# Altium PCB PCB.PcbDoc
Units mil, origin at the board's own origin, x right, y up, seen from the top; angles counter-clockwise.
Board outline 3149.61 x 1496.06 mil, 2 copper layers (Top Layer, Bottom Layer); 63 components, 30 nets, 170 pads, 22 vias.
Unrouted connection lines stored in the file: 66.
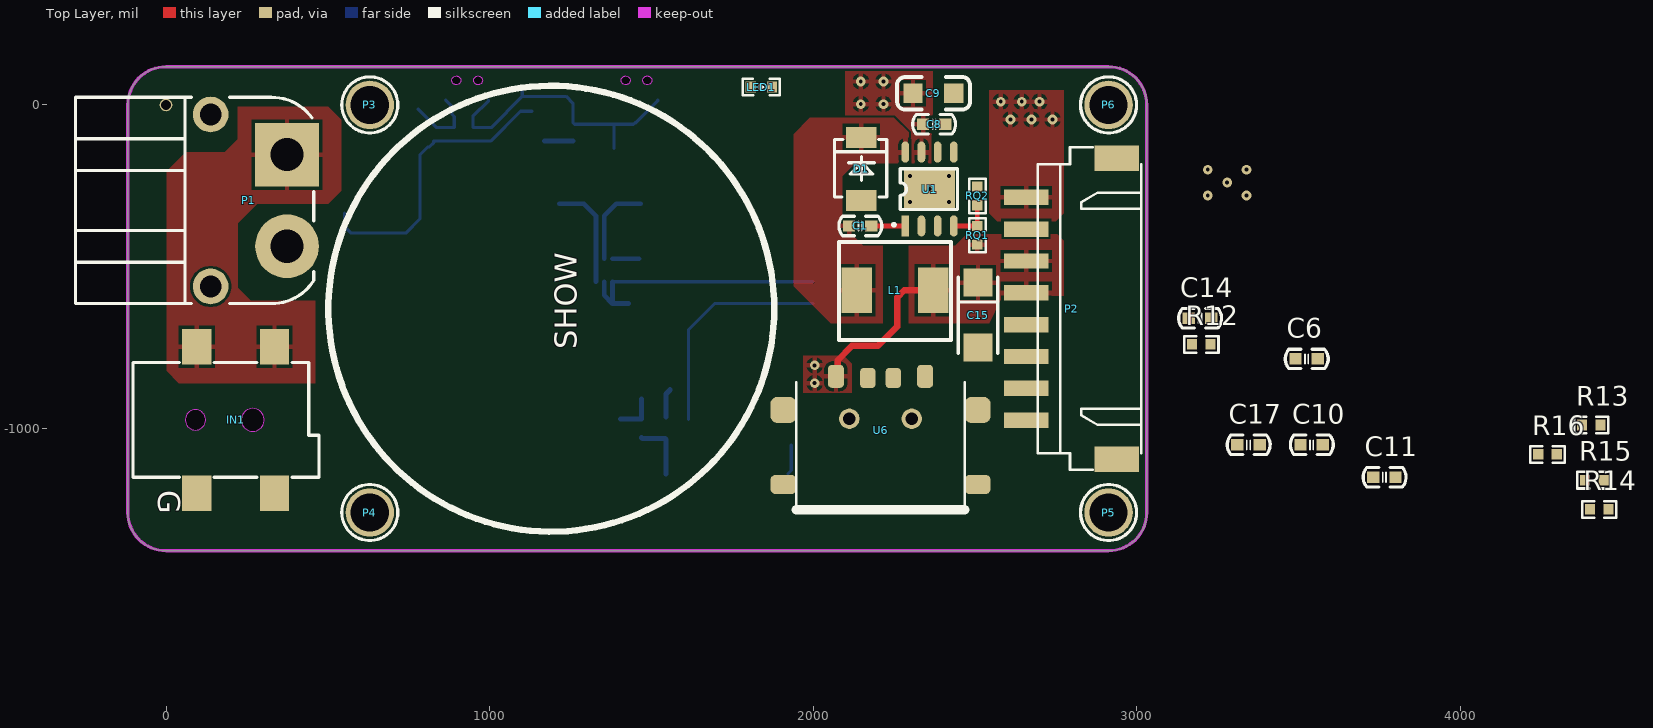
[diagram p0: Top Layer view]
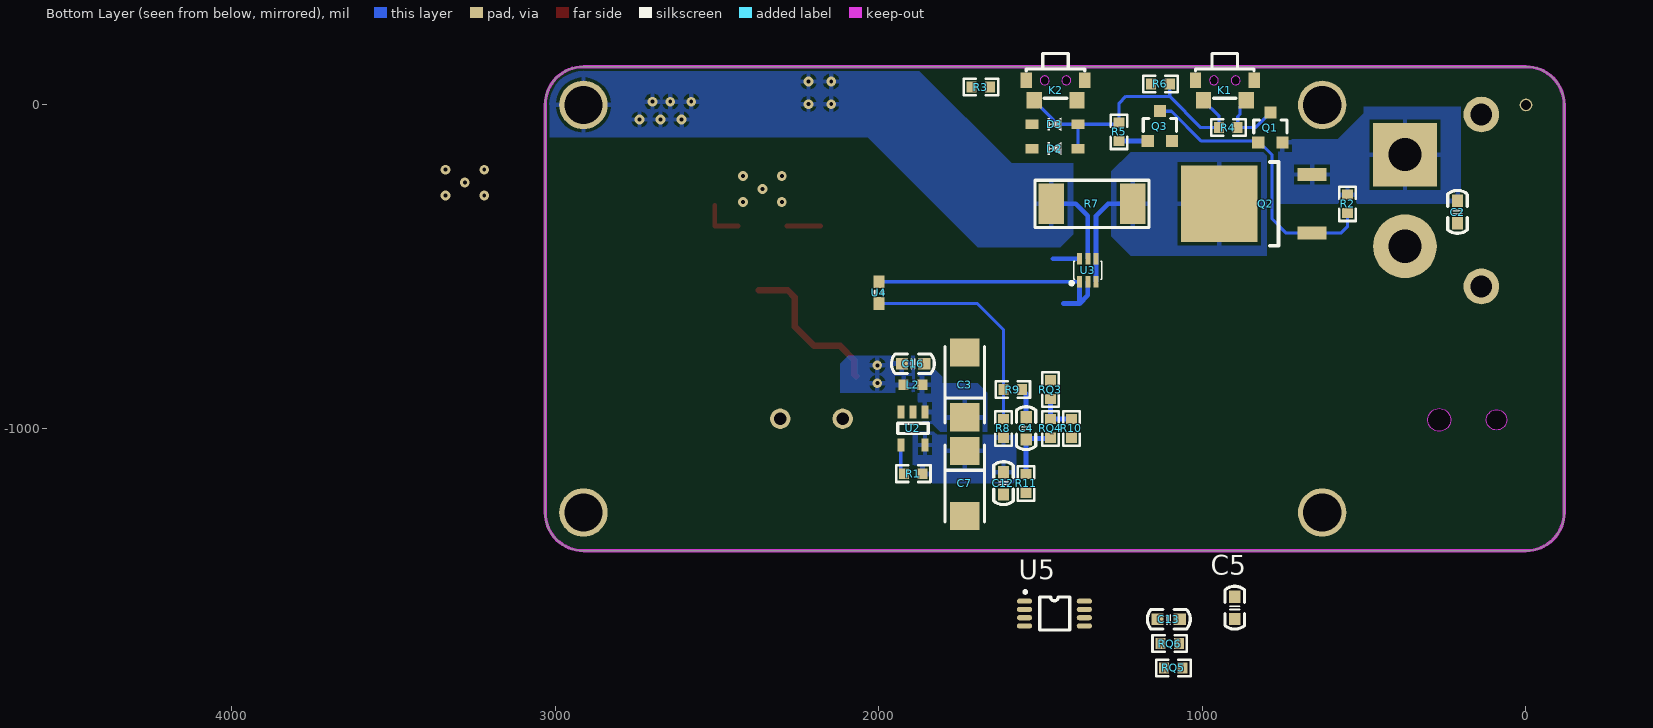
[diagram p1: Bottom Layer view, seen from below]

## Layer stack, top to bottom
Top Solder: solder mask 0.4, Solder Resist, Dk 3.5
Top Layer: signal copper 1.4
Dielectric 1: dielectric 12.6, FR-4, Dk 4.8
Bottom Layer: signal copper 1.4
Bottom Solder: solder mask 0.4, Solder Resist, Dk 3.5

## Board outline
0,-1377.95 cw(c0,-1259.84) -118.11,-1259.84 -118.11,0 cw(c0,0) 0,118.11 2913.39,118.11 cw(c2913.39,0) 3031.5,0 3031.5,-1259.84 cw(c2913.39,-1259.84) 2913.39,-1377.95

## Design rules (kind name [scope] priority, off if disabled: settings)
Clearance [All] p1: gap=8 ignorepadtopadclearanceinfootprint=TRUE
HoleSize [All] p1: absolutevalues=TRUE maxlimit=500 minlimit=0.98 maxpercent=80.000 minpercent=20.000
HoleToHoleClearance [All] p1: gap=6 allowstackedmicrovias=TRUE
MinimumSolderMaskSliver [All] p1: minsoldermaskwidth=4
PolygonConnect [All] p1: connectstyle=Relief reliefconductorwidth=15 reliefentries=4 polygonreliefangle="90 Angle" airgapwidth=10
RoutingVias [All] p1: holewidth=28 width=50 viastyle="Through Hole" minholewidth=12 minwidth=20 maxholewidth=28 maxwidth=50
SilkToSilkClearance [All] p1: silktosilkclearance=0
SilkToSolderMaskClearance [IsPad] p1: minsilkscreentomaskgap=0 clearancetoexposedcopper=TRUE
SolderMaskExpansion [All] p1: expansion=4 istentingtop=FALSE
Width [All] p1: maxlimit=80 minlimit=8 preferedwidth=10
25 further rules are at their usual default settings.

## Components (designator, comment, footprint, x,y, rotation, side; value= is the part's Value field where it differs from the comment)
C1 "10NF" CAP_0603 2111,-374.17 r0 top
C2 "100NF" CAP_0603 211.57,-365.59 r90 bottom
C3 "100UF" CAP_6032_C 1735,-865 r270 bottom
C4 "100NF" CAP_0603 1545,-1034 r90 bottom
C5 "100NF" CAP_0603 900,-1589 r90 bottom
C6 "100NF" CAP_0603 3491,-785 r0 top
C7 "100UF" CAP_6032_C 1735,-1170 r90 bottom
C8 "100NF" CAP_0603 2409,-60 r180 top
C9 "100NF" CAP_1206 2435,35 r180 top
C10 "100NF" CAP_0603 3506.57,-1050.59 r0 top
C11 "100NF" CAP_0603 3731.57,-1150.59 r0 top
C12 "100NF" CAP_0603 1615,-1204 r90 bottom
C13 "100NF" CAP_0603 1139,-1590 r180 bottom
C14 "100NF" CAP_0603 3161.38,-659.17 r0 top
C15 "100UF" CAP_6032_C 2510,-650 r90 top
C16 "100NF" CAP_0603 1860,-800 r0 bottom
C17 "100NF" CAP_0603 3311.57,-1050.59 r0 top
D1 "B5819W" DIODE-SMB 2150,-195 r270 top
D2 "B5819W" DIODE_SOD123 1385,-135 r0 bottom
D3 "B5819W" DIODE_SOD123 1385,-60 r0 bottom
IN1 "DC-005" AC-DC-SMT 95,-1200 r90 top
K1 "KEY" KEY-C-SIDE-3 1021.5,76 r180 bottom
K2 "KEY" KEY-C-SIDE-3 1544.6,76 r180 bottom
L1 "2.2UH" INDUCTANCE_0630 2250,-575 r180 top
L2 "磁珠" Inductor_0603 1895,-865 r180 bottom
LED1 "LED_R/G/B/Y" LED_0603_R 1840,55 r180 top
P1 "XT60PW" XT60-PW-M20 255.91,-295.28 r270 top
P2 "Bird" XH2.54-WS-8P 2854.65,-629.92 r90 top
P3 "铜柱6m" M3x6_L-Type 629.92,0 r0 top
P4 "铜柱6m" M3x6_L-Type 629.92,-1259.84 r0 top
P5 "铜柱6m" M3x6_L-Type 2913.39,-1259.84 r0 top
P6 "铜柱6m" M3x6_L-Type 2913.39,0 r0 top
Q1 "MOS_P" SOT23_3 790,-70 r270 bottom
Q2 "MOS_P" TO252_2 881.57,-305.59 r0 bottom
Q3 "NPN" SOT23_3 1131.57,-65.59 r270 bottom
R1 "10K" RESC_0603_2 1893.74,-1140 r180 bottom
R2 "10K" RESC_0603_2 551.57,-305.59 r90 bottom
R3 "10K" RESC_0603_2 1685,55 r180 bottom
R4 "10K" RESC_0603_2 920,-70 r180 bottom
R5 "1K" RESC_0603_2 1257.83,-83.11 r270 bottom
R6 "10K" RESC_0603_2 1130,65 r180 bottom
R7 "0.005Ω" 2512 1341.57,-305.59 r0 bottom
R8 "6.8K" RESC_0603_2 1615,-1000 r90 bottom
R9 "1K" RESC_0603_2 1586.26,-880 r180 bottom
R10 "1K" RESC_0603_2 1405,-1000 r270 bottom
R11 "0Ω" RESC_0603_2 1545,-1170 r90 bottom
R12 "1K" RESC_0603_2 3200,-740 r0 top
R13 "100K" RESC_0603_2 4405.2,-989.17 r0 top
R14 "1K" RESC_0603_2 4430,-1250 r180 top
R15 "100K" RESC_0603_2 4415,-1160 r180 top
R16 "1K" RESC_0603_2 4270,-1080 r0 top
RQ1 "1k" RESC_0603_2 2507.72,-402.91 r270 top
RQ2 "1k" RESC_0603_2 2507.72,-281.26 r270 top
RQ3 "10k" RESC_0603_2 1470,-880 r90 bottom
RQ4 "1.5k" RESC_0603_2 1470,-1000 r90 bottom
RQ5 "1k" RESC_0603_2 1090,-1740 r180 bottom
RQ6 "10k" RESC_0603_2 1101.26,-1665 r0 bottom
U1 "TPS5450" SOIC_8E 2360,-260 r0 top
U2 "LDO" SOT23_5 1895,-1000 r90 bottom
U3 "INA199-A1" SOT-363 1379.96,-546.46 r90 bottom
U4 "Temper" RESC_0603_1 2000,-580 r90 bottom
U5 "LM358" MSOP_8 1457.48,-1572.2 r270 bottom
U6 "USB-OUT" USB-A/F-S 2070.75,-848.9 r0 top

## Footprints (in the part's own frame and the unit in brackets; to place one, negate y for a bottom-side part, rotate by r counter-clockwise, add the part's x,y. Pads: shape width x height; smd on the part's side, far side on the other; paste and mask are expansions set on the pad)
2512 [mm] "64mm*32mm"
  rect 2.032x3.2 smd: 1(-3.2,0) 2(3.2,0)
  silkscreen extent -4.47,-1.85 4.47,1.85, body extent -3.2,-1.6 3.2,1.6, height 0.55
AC-DC-SMT [mm]
  rect 2.8x2.3 smd mask+0.051: 1(11.5,-6.1) 1(11.5,0) 2(0,0) 2(0,-6.1)
  Keep-Out Layer board cut-out: 6.55,0.1 6.471,0.447 6.249,0.725 5.928,0.88 5.572,0.88 5.251,0.725 5.029,0.447 4.95,0.1 4.95,0.1 5.029,-0.247 5.251,-0.525 5.572,-0.68 5.928,-0.68 6.249,-0.525 6.471,-0.247 6.55,0.1
  Keep-Out Layer board cut-out: 6.65,-4.4 6.561,-4.01 6.311,-3.696 5.95,-3.523 5.55,-3.523 5.189,-3.696 4.939,-4.01 4.85,-4.4 4.85,-4.4 4.939,-4.791 5.189,-5.104 5.55,-5.278 5.95,-5.278 6.311,-5.104 6.561,-4.791 6.65,-4.4
  silkscreen extent 1.25,-9.6 10.25,5, body extent -0.46,-9.67 12.04,5.03, height 11.2
CAP_0603 [mil]
  rect 38x35 smd: 1(0,0) 2(69,0)
  silkscreen extent -31,-30 101,30, body extent 4,-16 67,16, height 12
CAP_1206 [mil]
  rect 60x60 smd: 1(0,-1) 2(126,-1)
  silkscreen extent -50,-51 175,49, body extent 0,-32 126,31, height 39
CAP_6032_C [mm]
  rect 2.2x2.3 smd: 1(2.55,0) 2(-2.55,0)
  silkscreen extent -3,-1.55 3,1.55, body extent -3,-1.6 3,1.6, height 2.5
DIODE-SMB [mm]
  rect 1.65x2.4 smd: 1(2.539,-0.025) 2(-2.411,-0.025)
  silkscreen extent -2.25,-2.13 2.27,1.98, body extent -2.69,-2 2.81,1.9, height 2.45
DIODE_SOD123 [mm]
  rect 1x0.75 smd: 1(0,0) 2(3.6,0)
  silkscreen extent 1.3,-0.5 2.4,0.5, body extent -0.05,-0.8 3.65,0.8, height 1.27
INDUCTANCE_0630 [mm]
  rect 2.4x3.6 smd: 1(-3.074,-0.052) 2(2.926,-0.052)
  silkscreen extent -4.47,-3.85 4.33,3.85, body extent -4.03,-3.7 3.97,3.7, height 4.5
Inductor_0603 [mm]
  rect 0.8x0.85 smd: 1(-0.73,0) 2(0.73,0)
  body extent -0.8,-0.47 0.8,0.48, height 0.8
KEY-C-SIDE-3 [mil] "4*5MM"
  rect 35.4x47.2 smd mask+2: 0(0,0) 0(181.1,0)
  rect 47.2x51.2 smd mask+2: 1(24.6,-61) 2(156.5,-61)
  Keep-Out Layer board cut-out: 70.8,0 69.43,5.99 65.6,10.79 60.07,13.45 53.93,13.45 48.4,10.79 44.57,5.99 43.2,0 43.2,0 44.57,-5.99 48.4,-10.79 53.93,-13.45 60.07,-13.45 65.6,-10.79 69.43,-5.99 70.8,0 70.8,0
  Keep-Out Layer board cut-out: 137.8,0 136.43,5.99 132.6,10.79 127.07,13.45 120.93,13.45 115.4,10.79 111.57,5.99 110.2,0 110.2,0 111.57,-5.99 115.4,-10.79 120.93,-13.45 127.07,-13.45 132.6,-10.79 136.43,-5.99 137.8,0 137.8,0
  silkscreen extent 0,-55 181,83, body extent 1,-76 180,66, height 76
LED_0603_R [mm]
  rect 0.8x0.85 smd: 1(-0.832,0) 2(0.832,0)
  silkscreen extent -1.45,-0.65 1.45,0.65, body extent -0.81,-0.4 0.81,0.4, height 0.6
M3x6_L-Type [mm] "M3铜柱，长：6mm"
  round 3.8 hole 3: 1(0,0)
  silkscreen extent -2.2,-2.2 2.2,2.2, body extent -2.7,-2.35 2.7,2.35, height 8.55
MSOP_8 [mm]
  oval 0.4x1.2 smd: 1(-0.975,-2.35) 2(-0.325,-2.35) 3(0.325,-2.35) 4(0.975,-2.35) 5(0.975,2.35) 6(0.325,2.35) 7(-0.325,2.35) 8(-0.975,2.35)
  silkscreen extent -1.8,-2.4 1.3,1.2, body extent -1.5,-2.45 1.5,2.45, height 1.15
RESC_0603_1 [mm]
  rect 1x0.85 smd: 1(-0.857,0) 2(0.857,0)
  silkscreen extent -0.1,-0.3 0.1,0.3, body extent -0.8,-0.4 0.8,0.4, height 0.38
RESC_0603_2 [mm]
  rect 0.8x0.85 smd: 1(-0.73,0) 2(0.73,0)
  silkscreen extent -1.35,-0.65 1.35,0.65, body extent -0.8,-0.4 0.8,0.4, height 0.38
SOIC_8E [mm] "58mm"
  rect 0.6x1.65 smd: 1(-1.905,-2.9)
  oval 0.6x1.65 smd: 2(-0.635,-2.9) 3(0.635,-2.9) 4(1.905,-2.9) 5(1.905,2.9) 6(0.635,2.9) 7(-0.635,2.9) 8(-1.905,2.9)
  rect 4x3 smd: 9(0,0)
  silkscreen extent -2.9,-2.9 2.2,1.6, body extent -2.5,-3.01 2.5,3.01, height 1.75
SOT23_3 [mm]
  rect 0.95x0.95 smd: 1(1.175,-0.95) 2(1.175,0.95) 3(-1.175,0)
  silkscreen extent -0.6,-1.3 0.4,1.3, body extent -1.34,-1.5 1.3,1.5, height 1.08
SOT23_5 [mm]
  rect 1x0.55 smd: 1(1.3,-0.95) 2(1.3,0) 3(1.3,0.95) 4(-1.3,0.95) 5(-1.3,-0.95)
  silkscreen extent -0.4,-1.21 0.4,1.19, body extent -1.52,-1.51 1.48,1.49, height 1.3
SOT-363 [mm] "ina199"
  rect 0.9x0.4 smd: 1(0,0) 2(0,-0.65) 3(0,-1.3) 4(1.8,-1.3) 5(1.8,-0.65) 6(1.8,0)
  silkscreen extent -0.24,-1.75 1.6,0.75, body extent -0.37,-2.03 2.06,0.76, height 1.08
TO252_2 [mm]
  rect 2.3x1 smd: 1(-5.6,2.3) 2(-5.6,-2.3)
  rect 6x6 smd: 3(1.7,0)
  silkscreen extent -2.95,-3.29 -2.29,3.29, body extent -5.5,-3.29 4.2,3.29, height 2.3
USB-A/F-S [mm]
  rrect50% 1.27x1.8 smd: 1(0,0.254) 4(7,0.254)
  rrect50% 1.2x1.6 smd: 2(2.5,0.127) 3(4.5,0.127)
  rrect50% 2.032x1.5 smd: 5(-4.125,-8.236) 6(11.125,-8.236)
  rrect50% 2.032x2.032 smd: 5(-4.125,-2.382) 6(11.125,-2.382)
  round 1.6 hole 1 unplated: MH1(5.95,-3.076) MH2(1.05,-3.076)
  silkscreen extent -3.1,-10.23 10.1,-0.23, body extent -5.12,-11.05 12.12,0.01, height 6.4
XH2.54-WS-8P [mm] "长：25mm，宽：8mm，高：6.1mm"
  rect 2x3.5 smd: 0(-11.827,-2.15) 0(11.827,-2.15)
  rect 1.2x3.5 smd: 1(-8.75,4.981) 2(-6.25,4.981) 3(-3.75,4.981) 4(-1.25,4.981) 5(1.25,4.981) 6(3.75,4.981) 7(6.25,4.981) 8(8.75,4.981)
  silkscreen extent -12.66,-4.06 12.66,4.06, body extent -12.5,-4 12.5,6.42, height 6.05
XT60-PW-M20 [mm] "长：18.8mm， 宽：16mm，高：8.6mm"
  round 2.8 hole 1.7: 0(-6.75,-3) 0(6.75,-3)
  rect 5x5 hole 2.6: 1(-3.6,3)
  round 5 hole 2.6: 2(3.6,3)
  silkscreen extent -8.1,-13.6 8.1,5.1, body extent -7.75,-14.97 7.75,5.03, height 9.7

## Part data
C1 C2 C4 C5 C6 C8 C9 C10 C11 C12 C13 C14 C16 C17: library part CAP, "CAP  12~50V"
C3 C7 C15: library part CAP_TA, "CAP  6~12V  钽电容"
D1 D2 D3: library part Diode-SM, "Diode_肖特基/二极管"
IN1: library part DC002, "Interface"
K1 K2: "Key"
L1 L2: library part Inductor, "Inductor", Code_IEC=1005, Code_JEITA=0402, LatestRevisionDate=29-May-2009, LatestRevisionNote="IPC-7351 Footprint Added.", PackageDescription="Chip Inductor", PackageReference=0402-A, Published=8-Jun-2000, Publisher="Altium Limited"
LED1: library part LED_SMT, "LED"
P1: library part XT60, "Interface"
P2: library part Bird_8pin, "Header"
P3 P4 P5 P6: library part Pillar, "IN-OUT"
Q1 Q2: library part MOSFET_P, "MOS"
R1 R2 R3 R4 R5 R6 R7 R8 R9 R10 R11 R12 R13 R14 R15 R16: library part RES, "RES 贴片"
RQ1 RQ2 RQ3 RQ4 RQ5 RQ6: library part RES_quality, "RES"
U1: library part TPS5450DDAR, "DC-DC"
U2: library part LDO_SOT23-5, "LDO  3.3V  500ma"
U3: library part INA199, "INA199-A1_6PIN"
U4: "Mode"
U5: library part LM(v)358, "OPA,5v"
U6: "USB"

## Free pads (board coordinates)
  round 39.37 hole 31.5: 0(0,0)

## Via types
v1: diameter 30, hole 12, Top Layer to Bottom Layer, 22 vias

## Nets (pads, with @x,y where several pads share a name; then routed paths per layer and width w, separated by ;. In a path a pad name is that pad's centre, name@x,y a point inside that pad or via, vN(x,y) a via of type N, cw(c..) or ccw(c..) an arc to the next point about the centre after c; other vN are vias at no path point)
3V0: C13.2 RQ5.2 RQ6.1 U5.3
+5: C15.1 C16.2 C17.2 L1.1 L2.1 P2.5 P2.6 RQ1.2 U5.8 U6.1 | length 489.3
  Top Layer w20: U6.1 2076.19,-833.45 2076.19,-788.81 2120,-745 2200,-745 2260,-685 2260,-595 2282.06,-572.94 L1.1
  other v1: 2005,-860 2005,-805
ADC_Ele: C14.2 R12.2
ADC_Temp: C4.2 R9.2 | length 90.2
  Bottom Layer w16: C4.2 1545,-893.5 1557.52,-880.98 R9.2
ADC_Vol: C5.2 R10.2
AGND: C4.1 C5.1 C6.1 C13.1 C14.1 R11.2 R15.1 R16.1 RQ4.1 RQ6.2 U3.1 U3.2 U4.2 U5.4 | length 1000.2
  Bottom Layer w10: U3.1 1380.16,-546.26 U4.2
  Bottom Layer w15: U3.2 1354.37,-588.39 1379.96,-613.98 ; U3.1 1379.96,-613.98 ; 1429.96,-613.98 1379.96,-613.98
  Bottom Layer w16: RQ4.1 1472.63,-1031.37 1542.37,-1031.37 C4.1 R11.2
ELE_OUT: R12.1 R13.1 U3.6 U5.2 | length 81.6
  Bottom Layer w15: U3.6 1461.57,-475.59
GND: C2.1 C3.2 C7.2 C8.1 C9.1 C10.1 C11.1 C12.1 C15.2 C16.1 C17.1 D1.1 IN1.2 K2.2 LED1.1 P1.2 P2.3 P2.4 P3.1 P4.1 P5.1 Q3.2 R6.1 R11.1 RQ2.1 U1.6 U1.9 U2.2 U6.4 U6.5 U6.6
  other v1: 2300,-300 2420,-300 2360,-260 2300,-220 2420,-220
KEY1: D2.1 D3.1 K1.1 K2.1 R4.1 R5.1 R6.2 | length 913.6
  Bottom Layer w10: K1.1 996.9,13 948.74,-35.16 R4.1 1005,-70 1101.26,26.26 ; 1101.26,45.98 1101.26,26.26 ; D2.1 D3.1 ; K2.1 1520,13 1452,-55 1450,-55 1445,-60 D3.1 ; 1101.26,26.26 1236.57,26.26 1257.83,5 R5.1 1263.46,-60 D3.1
KEY2: K1.2 Q1.3 R3.2 R4.2 RQ3.2 | length 232.2
  Bottom Layer w10: Q1.3@778.74,-12.48 Q1.3 836.26,-70 R4.2 891.26,-35.76 883.6,-28.1 883.6,-3.6 K1.2
KEY_EN: D2.2
KEY_OPA: D3.2 R13.2 R16.2 U5.1
NetC1_1: C1.1 D1.2 L1.2 U1.8
NetC1_2: C1.2 U1.1 | length 105
  Top Layer w15: C1.2 U1.1
NetC3_1: C3.1 L2.2 U2.1
NetLED1_2: LED1.2 R3.1
NetQ1_1: Q1.1 Q2.1 Q3.3 R2.1 | length 904.4
  Bottom Layer w10: R2.1 551.57,-375.59 572.13,-396.14 Q2.1 741.02,-396.14 785,-352.17 785,-154.25 809.29,-129.96 813.7,-129.96 Q1.1 827.4,-111.85 1003.15,-111.85 1095.67,-19.33 Q3.3
NetQ3_1: Q3.1 R5.2 | length 88.9
  Bottom Layer w15: Q3.1 R5.2
NetR1_1: R1.1 U2.4 | length 92.9
  Bottom Layer w10: R1.1 1932.4,-1130.08 U2.4
NetR8_2: R8.2 R9.1 U4.1 | length 694.9
  Bottom Layer w10: R8.2 R9.1 1615,-695 1696.26,-613.74 U4.1
NetR10_1: R10.1 RQ3.1 RQ4.2 | length 127.5
  Bottom Layer w16: R10.1 RQ4.2 RQ3.1
NetR14_2: R14.2 U5.6
NetRQ1_1: RQ1.1 RQ2.2 U1.4 | length 136.9
  Top Layer w15: U1.4 RQ1.1 RQ2.2
OUTB: R14.1 R15.2 U5.7
SCL: P2.2
SDA: P2.1
VCC: C8.2 C9.2 C10.2 P2.7 P2.8 P6.1 R7.2 U1.7 U3.5 | length 261.4
  Bottom Layer w15: U3.5 1354.37,-342.79 1391.57,-305.6 R7.2
  other v1: 2610,-45 2675,-45 2740,-45 2147.5,2.5 2217.5,2.5 2580,10 2645,10 2700,10 2147.5,72.5 2217.5,72.5
VDD: C7.1 C11.2 C12.2 R1.2 R8.1 RQ5.1 U2.5
VIN: C2.2 IN1.1 P1.1 Q1.2 Q2.2 R2.2
VK_OUT: C6.2 Q2.3 R7.1 U3.3 U3.4 | length 332.3
  Bottom Layer w15: R7.1 1291.58,-305.6 1328.78,-342.79 U3.4 U3.3
pads on no net: K1.0 K2.0 P1.0 P2.0 U1.2 U1.3 U1.5 U2.3 U5.5 U6.2 U6.3 U6.MH1 U6.MH2
copper on no net:
  other v1: 3220,-280 3340,-280 3280,-240 3220,-200 3340,-200

## Polygon pours and split planes (outlines as drawn)
+5 on Top Layer "+5_L01_P016" (solid, remove dead copper, pour order 16): 1970,-775 2095,-775 2120,-800 2120,-890 1970,-890
+5 on Top Layer "+5_L01_P012" (solid, remove dead copper, pour order 12): 2295,-435 2440,-435 2475,-400 2755,-400 2775,-420 2775,-590 2585,-590 2545,-675 2295,-675
VCC on Top Layer "VCC_L01_P010" (solid, remove dead copper, pour order 10): 2545,45 2545,-335 2570,-360 2750,-360 2775,-335 2775,45
VCC on Top Layer "VCC_L01_P005" (solid, remove dead copper, pour order 5): 2100,105 2100,-35 2305,-106.32 2305,-180 2365,-180 2365,-95 2370,-90 2370,105
NetC1_1 on Top Layer "NETC1_1_L01_P004" (solid, remove dead copper, pour order 4): 2295,-180 2295,-85 2250,-40 1990,-40 1940,-90 1940,-560 2055,-675 2215,-675 2215,-435 2155,-435 2090,-370 2090,-220 2130,-180
VIN on Top Layer "VIN_L01_P000" (solid, remove dead copper, pour order 0): 501.57,-5.59 541.57,-45.59 541.57,-265.59 501.57,-305.59 281.57,-305.59 221.57,-365.59 221.57,-565.59 261.57,-605.59 461.57,-605.59 461.57,-860 40,-860 1.57,-821.57 1.57,-205.59 61.57,-145.59 181.57,-145.59 221.57,-105.59 221.57,-5.59
VCC on Bottom Layer "VCC_L02_P017" (solid, remove dead copper, pour order 17): 1400,-180 1590,-180 1880,110 3040,110 3040,-100 2035,-100 1695,-440 1440,-440 1400,-400
+5 on Bottom Layer "+5_L02_P015" (solid, pour order 15): 1890,-775 1990,-775 2095,-775 2120,-800 2120,-890 1890,-890
VDD on Bottom Layer "VDD_L02_P014" (solid, pour order 14): 1820,-1020 1830,-1010 1885,-1010 1895,-1020 1895,-1160 1885,-1170 1585,-1170 1575,-1160 1575,-1020
NetC3_1 on Bottom Layer "NETC3_1_L02_P013" (solid, pour order 13): 1880,-820 1880,-920 1875,-925 1875,-980 1870,-985 1835,-985 1810,-1010 1665,-1010 1665,-890 1695,-860 1805,-860 1805,-840 1825,-820
VK_OUT on Bottom Layer "VK_OUT_L02_P002" (solid, remove dead copper, pour order 2): 801.57,-145.59 1221.57,-145.59 1281.57,-205.59 1281.57,-405.59 1221.57,-465.59 801.57,-465.59
VIN on Bottom Layer "VIN_L02_P001" (solid, pour order 1): 201.57,-5.59 501.57,-5.59 501.57,-25.59 581.57,-105.59 765,-105.59 765,-305.59 201.57,-305.59

## Keep-outs
Keep-Out Layer:
  the board outline again, w10

## Silkscreen, mask and mechanical layers (free items; w line width, h text height)
Top Overlay:
  circle w20: c1190.94,-629.92 r688.98
  text "SHOW" at 1292.21,-755.8 h118.11 r90
Mechanical 15:
  lines w10: 29.53,-629.92 1230.31,-629.92 ; 629.92,-1259.84 629.92,0 ; 2913.39,-1259.84 2913.39,0

## Text inside footprints (layer, text, board x,y; h text height)
IN1: Top Overlay "G" at -47.61,-1190.26 h118.11 r270